# Altium PCB SY_HR08_MCU_PCB_V1.1.PcbDoc (part 3 of 3)
Units mm, origin at the board's own origin, x right, y up, seen from the top; angles counter-clockwise.
Board outline 140 x 80 mm, 2 copper layers (Top Layer, Bottom Layer); 373 components, 215 nets, 1143 pads, 670 vias.
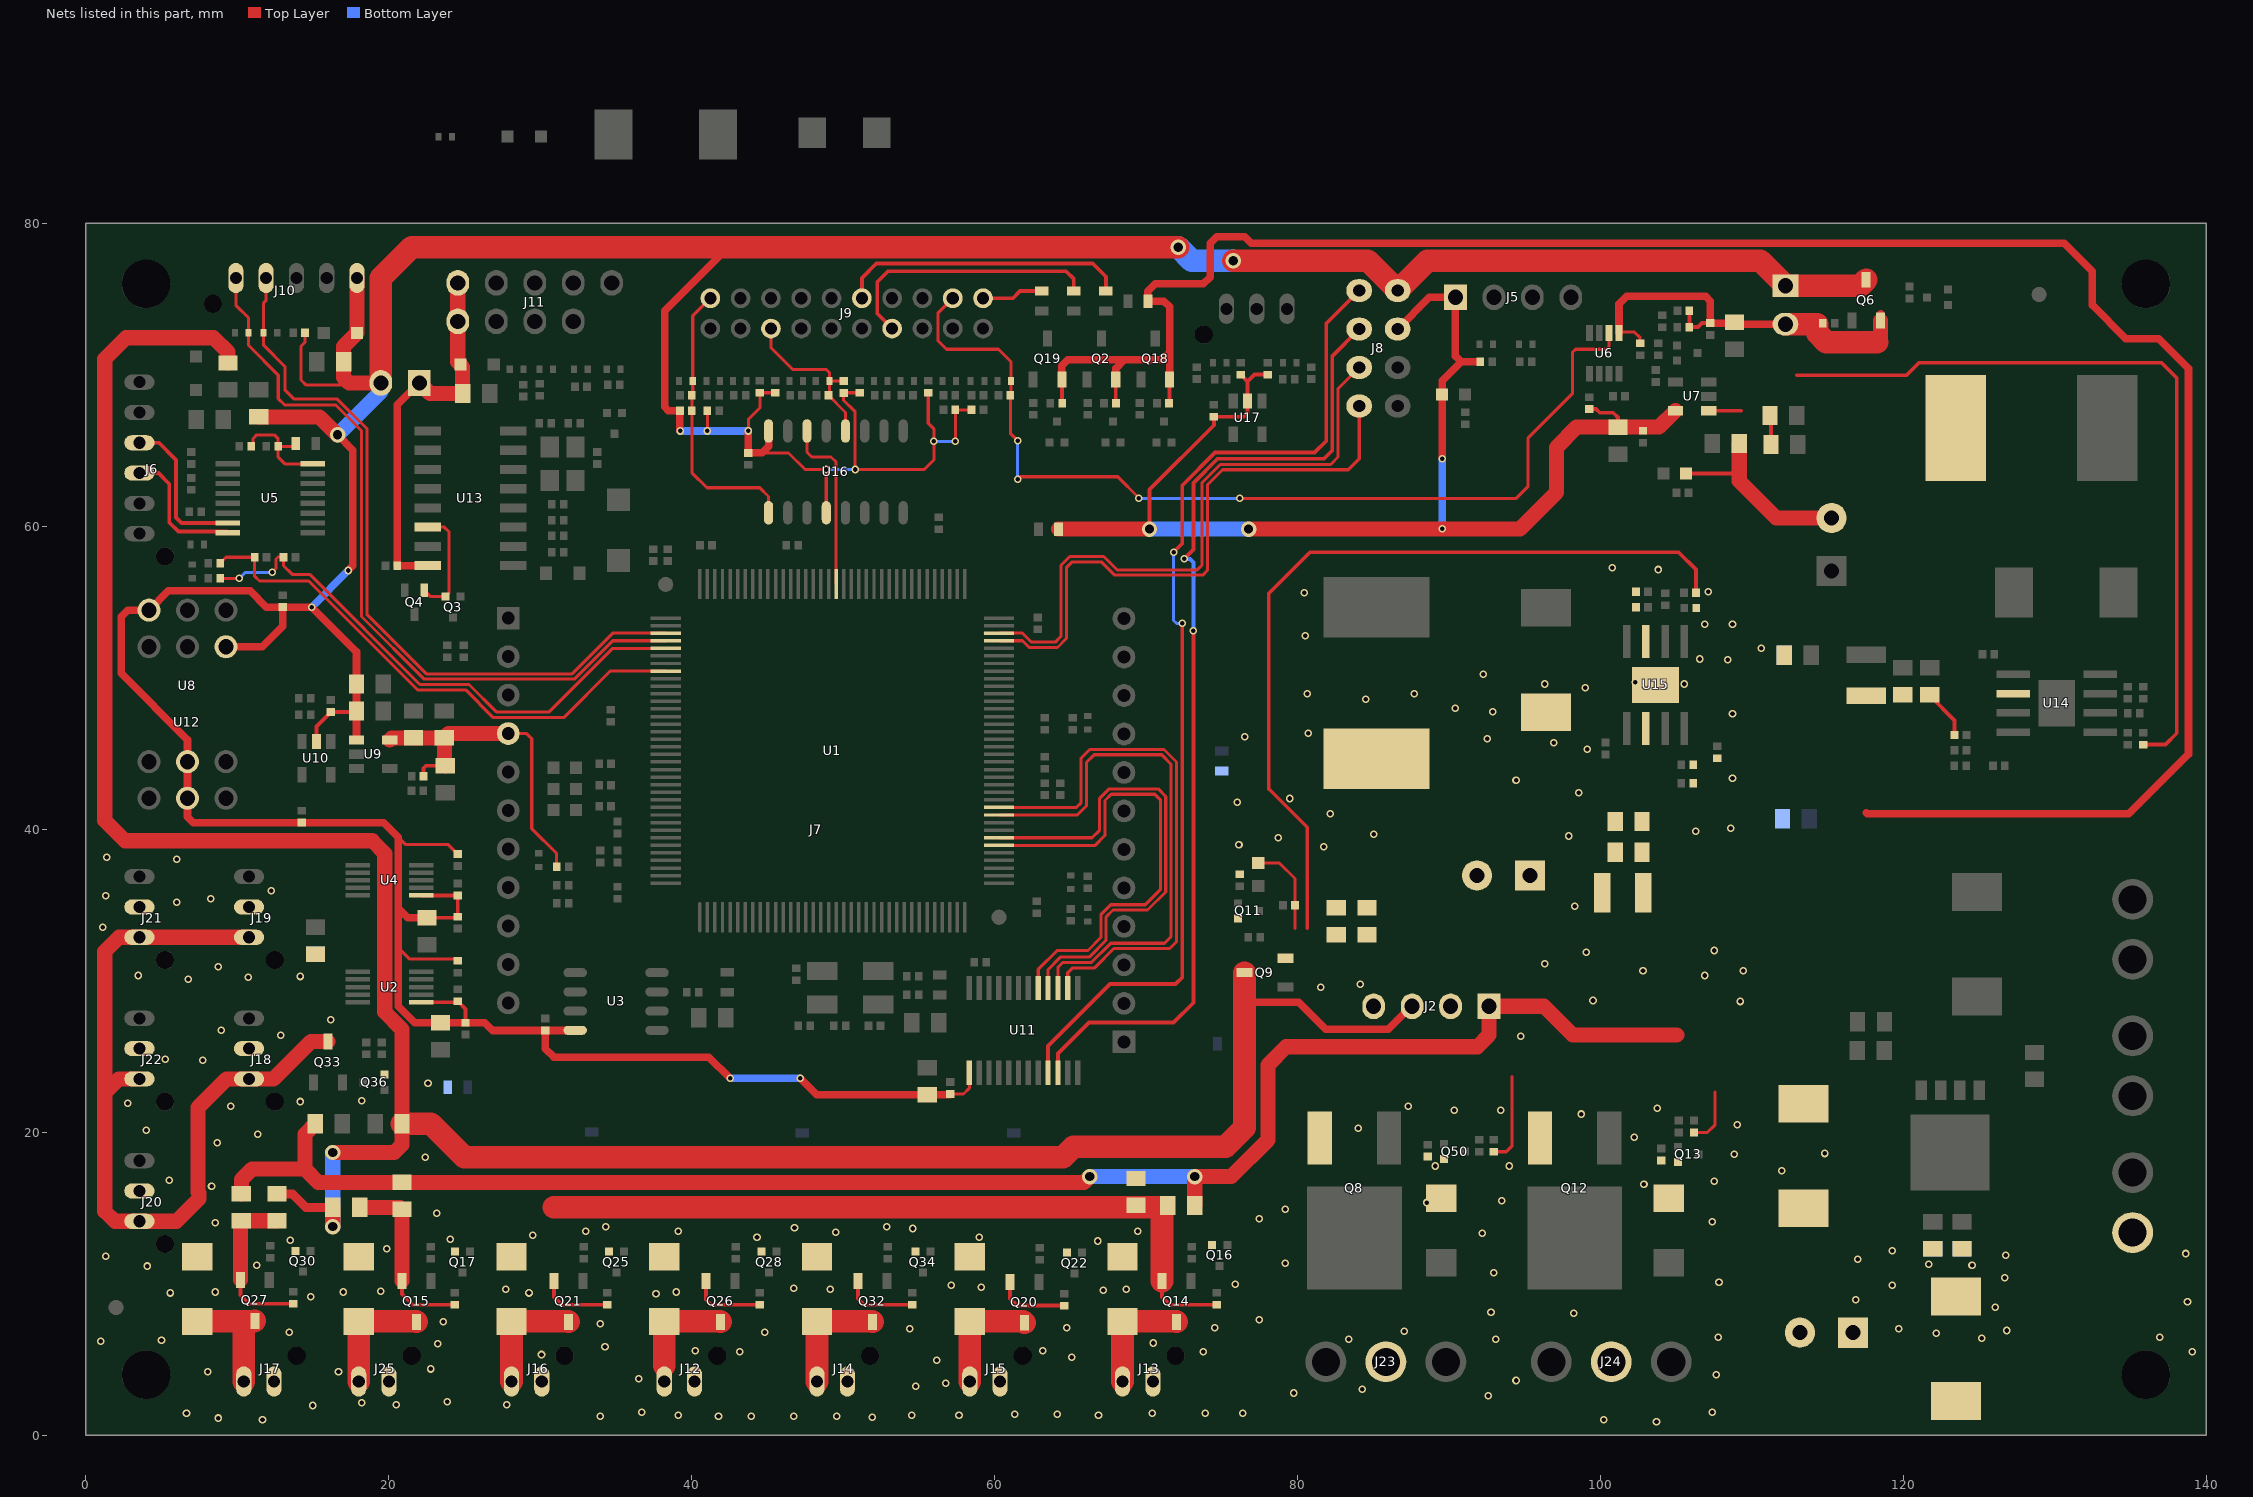
[diagram p3: the nets of this part, all layers, seen from the top]

## Via types
v1: diameter 0.5, hole 0.3, Top Layer to Bottom Layer, tented both sides, 661 vias
v2: diameter 1.016, hole 0.61, Top Layer to Bottom Layer, tented both sides, 9 vias

## Nets (pads, with @x,y where several pads share a name; then routed paths per layer and width w, separated by ;. In a path a pad name is that pad's centre, name@x,y a point inside that pad or via, vN(x,y) a via of type N, cw(c..) or ccw(c..) an arc to the next point about the centre after c; other vN are vias at no path point) (continued)
PB_GS: U1.90 U16.14 | length 11.6
  Top Layer w0.203: U16.14@47.625,66.296 47.625,64.897 47.942,64.579 49.212,64.579 49.546,64.246 U1.90@49.546,56.197
PGND: C1.2 C71.1 C72.2 C73.1 C74.1 C75.1 C76.1 C77.1 C78.1 C79.1 C80.2 C82.2 D3.1 D23.2 D25.2 D26.2 D27.2 D28.2 D29.2 D30.2 D31.2 D32.2 D33.2 J2.2 J2.4 J12.2 J13.2 J14.2 J15.2 J16.2 J17.2 J18.2 J19.2 J20.2 J21.2 J22.2 J23.2 J24.2 J25.2 Q11.2 Q13.2 Q16.2 Q17.2 Q22.2 Q25.2 Q28.2 Q30.2 Q34.2 Q36.2 Q50.2 R3.2 R4.2 R5.2 R6.2 R28.1 R79.1 R83.1 R84.1 R86.1 R89.1 R90.1 R91.1 R92.1 R107.1 R136.1 R137.1 R138.1 R139.1 R140.1 U15.7 U15.9
  other v1: 103.695,0.889 11.684,1.016 100.203,1.016 8.763,1.143 51.943,1.206 33.972,1.27 41.783,1.27 43.942,1.27 46.736,1.27 49.593,1.27 39.116,1.333 54.546,1.333 57.658,1.333 66.865,1.333 61.341,1.397 64.135,1.397 6.667,1.46 70.421,1.46 73.914,1.46 76.391,1.46 36.703,1.524 107.379,1.524 14.986,1.968 20.511,2.032 27.813,2.032 18.224,2.159 23.876,2.222 92.583,2.603 79.756,2.794 84.264,3.048 54.8,3.238 56.769,3.429 94.424,3.619 36.512,3.746 107.632,4 8.064,4.191 16.7,4.191 22.796,4.381 100.647,4.381 56.197,4.953 65.087,5.143 86.487,5.271 30.099,5.334 43.18,5.524 73.787,5.524 139.065,5.524 40.259,5.588 63.182,5.588 34.29,5.842 23.241,6.032 70.485,6.096 1.016,6.223 5.016,6.286 83.376,6.35 93.091,6.35 125.158,6.413 107.759,6.477 136.906,6.477 122.174,6.731 13.462,6.794 44.831,6.794 87.058,6.858 126.809,6.921 54.419,7.048 119.697,7.048 64.77,7.112 74.549,7.112 33.972,7.366 23.622,7.493 77.47,7.62 98.234,8.064 92.773,8.128 126.047,8.445 138.748,8.826 116.84,8.954 14.859,9.144 37.655,9.335 5.588,9.398 29.273,9.398 8.572,9.461 17.018,9.461 38.989,9.461 19.494,9.525 67.183,9.588 27.749,9.652 49.149,9.652 68.707,9.652 46.736,9.716 59.118,9.779 57.15,9.906 119.253,9.906 75.882,9.97 107.823,10.096 126.682,10.414 92.964,10.731 4.064,11.176 11.303,11.239 124.523,11.239 121.666,11.303 79.184,11.367 116.967,11.62 1.333,11.811 126.746,11.874 138.62,12.002 119.253,12.192 19.875,12.319 66.802,12.827 13.525,12.89 24.066,12.954 44.323,13.081 58.991,13.081 29.527,13.208 92.202,13.335 49.53,13.399 33.02,13.462 39.116,13.462 69.469,13.462 54.61,13.652 46.799,13.716 34.353,13.779 52.895,13.779 8.572,14.034 107.379,14.097 77.47,14.287 23.177,14.668 79.184,14.922 88.519,15.367 93.472,15.494 8.319,16.447 102.87,16.573 107.505,16.764 5.524,16.828 111.95,17.462 89.09,17.78 93.98,17.78 22.415,18.351 108.839,18.542 114.808,18.605 8.7,19.304 102.235,19.685 11.367,19.875 4,20.13 84.01,20.256 109.029,20.511 98.742,21.209 90.361,21.463 93.408,21.463 103.759,21.59 9.588,21.717 87.312,21.717 2.794,21.907 14.16,22.034 18.224,22.098 22.606,23.241 7.747,24.765 5.271,24.828 94.742,26.352 12.89,26.416 8.954,26.733 16.192,27.432 109.22,28.639 99.504,28.702 81.534,29.591 84.138,29.781 6.794,30.099 10.731,30.226 14.16,30.29 3.492,30.353 106.87,30.353 102.806,30.67 109.41,30.67 8.763,30.924 96.329,31.115 99.06,31.877 107.505,32.004 1.143,33.528 98.298,34.925 6.032,35.179 8.255,35.433 1.333,35.623 12.255,35.941 6.032,38.036 1.397,38.163 81.724,38.862 76.136,38.989 78.74,39.433 97.917,39.56 85.026,39.688 106.299,39.878 108.585,40.069 82.169,41.021 76.01,41.783 79.502,42.037 98.552,42.418 94.424,43.243 108.712,43.37 99.123,45.276 96.901,45.72 92.519,45.974 76.517,46.101 80.709,46.355 108.712,47.625 92.9,47.752 90.424,48.006 84.519,48.578 80.645,48.959 87.694,48.959 98.996,49.34 96.329,49.593 105.537,49.593 102.298,49.721 92.266,50.228 108.394,51.181 106.553,51.244 110.617,51.943 80.518,52.768 106.87,53.53 108.712,53.53 80.454,55.626 107.124,55.689 103.822,57.15 100.774,57.277
PRINT: C41.2 D38.1 J9.3 R112.1 U16.12 | length 11.1
  Top Layer w0.203: J9.3@45.245,73.057 45.245,71.786 46.672,70.358 48.895,70.358 49.101,70.152 D38.1@49.101,69.596 ; R112.1@50.038,69.596 D38.1@49.101,69.596 ; U16.12@50.165,66.296 50.165,67.517 C41.2@49.039,68.644 49.101,68.706 D38.1@49.101,69.596
PWM_MCU1: U1.42 U11.17 | length 31.8
  Top Layer w0.203: U1.42@60.296,38.948 66.642,38.948 67.299,39.605 67.299,41.908 67.71,42.319 70.584,42.319 70.949,41.954 70.949,36.016 69.958,35.024 67.672,35.024 67.02,34.373 67.02,32.857 66.167,32.004 64.135,32.004 62.887,30.756 U11.17@62.887,29.533
PWM_MCU2: U1.43 U11.16 | length 32.1
  Top Layer w0.203: U1.43@60.296,39.448 66.435,39.448 66.937,39.949 66.937,42.045 67.564,42.672 70.802,42.672 71.303,42.172 71.303,35.87 70.104,34.671 67.818,34.671 67.373,34.227 67.373,32.694 66.247,31.567 64.35,31.567 63.537,30.754 U11.16@63.537,29.533
PWM_MCU3: U1.46 U11.15 | length 36
  Top Layer w0.203: U1.46@60.296,40.948 65.468,40.948 66.076,41.555 66.076,44.422 66.576,44.922 71.037,44.922 71.656,44.304 71.656,32.921 71.219,32.484 67.663,32.484 66.393,31.214 64.497,31.214 64.187,30.905 U11.15@64.187,29.533
PWM_MCU4: U1.47 U11.14 | length 36.3
  Top Layer w0.203: U1.47@60.296,41.448 65.405,41.448 65.722,41.765 65.722,44.704 66.294,45.276 71.183,45.276 72.009,44.45 72.009,32.575 71.564,32.131 67.882,32.131 66.611,30.861 65.155,30.861 64.837,30.543 U11.14@64.837,29.533
PWM_REV1: J8.3 U11.10 | length 65.4
  Top Layer w0.254: U11.10@64.187,23.934 64.187,25.198 66.23,27.241 71.819,27.241 73.129,28.552 v1(73.129,53.109) ; v1(72.517,57.848) 73.129,58.461 73.129,62.865 74.73,64.466 81.738,64.466 82.298,65.026 82.298,71.249 J8.3@84.074,73.025
  Bottom Layer w0.254: v1(72.517,57.848) 72.898,57.848 73.129,57.617 v1(73.129,53.109)
PWM_REV2: J8.1 U11.9 | length 67.2
  Top Layer w0.254: U11.9@63.537,23.934 63.537,25.691 67.627,29.781 71.945,29.781 72.39,30.226 v1(72.39,53.594) ; v1(71.819,58.293) 72.39,58.864 72.39,62.697 74.563,64.87 81.126,64.87 81.894,65.638 81.894,73.385 J8.1@84.074,75.565
  Bottom Layer w0.203: v1(71.819,58.293) 71.819,53.785 72.009,53.594 v1(72.39,53.594)
PWR_VALVE1: D28.1 J13.1 Q14.3 | length 7.6
  Top Layer w1.5: J13.1@68.453,3.556 68.453,7.46 68.422,7.491 D28.1@68.453,7.522 71.98,7.522 Q14.3@72.009,7.493
PWR_VALVE2: D27.1 J15.1 Q20.3 | length 7.6
  Top Layer w1.5: J15.1@58.369,3.556 D27.1@58.369,7.522 61.884,7.522 Q20.3@61.976,7.429
PWR_VALVE3: D26.1 J12.1 Q26.3 | length 6.6
  Top Layer w1.5: 38.202,4.597 D26.1@38.202,7.522 41.881,7.522 Q26.3@41.91,7.493
PWR_VALVE4: D25.1 J14.1 Q32.3 | length 7.6
  Top Layer w1.5: J14.1@48.285,3.556 D25.1@48.285,7.522 51.914,7.522 Q32.3@51.943,7.493
PWR_VALVE5: D29.1 J16.1 Q21.3 | length 7.7
  Top Layer w1.5: J16.1@28.118,3.556 D29.1@28.118,7.522 31.848,7.522 Q21.3@31.877,7.493
PWR_VALVE6: J18.3 J19.3 J20.3 J21.3 J22.3 Q33.3 | length 53.3
  Top Layer w1: J22.3@3.556,23.527 2.191,23.527 1.27,22.606 ; J19.3@10.795,32.877 J21.3@3.556,32.877 2.206,32.877 1.27,31.941 1.27,22.606 ; Q33.3@16.002,25.988 14.875,25.988 12.414,23.527 J18.3@10.795,23.527 9.303,23.527 7.418,21.642 7.418,16.074 7.493,15.999 7.493,15.621 6.001,14.129 J20.3@3.556,14.129 1.937,14.129 1.27,14.795 1.27,22.606
PWR_VALVE_REV1: D30.1 J25.1 Q15.3 | length 7.8
  Top Layer w1.5: J25.1@18.034,3.556 D30.1@18.034,7.522 21.815,7.522 Q15.3@21.844,7.493
PWR_VALVE_REV2: D31.1 J17.1 Q27.3 | length 7.8
  Top Layer w1.5: D31.1@7.366,7.522 10.446,7.522 ; J17.1@10.446,3.556 10.446,7.522 ; Q27.3@11.176,7.556 11.141,7.522 10.446,7.522
PWRKEY+: C53.2 D46.1 J9.12 U6.2 | length 64.8
  Top Layer w0.203: J9.12@57.244,75.057 56.261,74.074 56.261,72.263 56.832,71.691 60.261,71.691 61.092,70.861 D46.1@61.092,69.596 61.092,68.687 C53.2@61.049,68.644 61.049,66.141 v1(61.531,65.659) ; v1(61.531,63.119) 61.686,63.274 68.135,63.274 69.532,61.877 v1(69.532,61.849) ; v1(76.2,61.849) 94.433,61.849 95.207,62.623 95.207,65.813 98.144,68.75 98.144,71.474 98.361,71.691 100.393,71.691 100.569,71.867 U6.2@100.569,72.771
  Bottom Layer w0.203: v1(61.531,63.119) v1(61.531,65.659) ; v1(69.532,61.849) v1(76.2,61.849)
PWRLED+: J9.11 R52.2 | length 4.1
  Top Layer w0.254: J9.11@59.244,75.057 61.214,75.057 61.684,75.527 R52.2@63.119,75.527
RCD: J9.15 R51.2 | length 19.1
  Top Layer w0.254: J9.15@51.244,75.057 51.244,76.391 52.197,77.343 66.484,77.343 67.352,76.475 R51.2@67.352,75.527
RS232_RX: J6.4 U5.8 | length 9
  Top Layer w0.254: J6.4@3.556,63.516 4.81,63.516 5.524,62.801 5.524,60.261 6.137,59.649 9.317,59.649 U5.8@9.392,59.574
RS232_TX: J6.3 U5.7 | length 10.3
  Top Layer w0.254: J6.3@3.556,65.516 4.842,65.516 5.969,64.389 5.969,60.579 6.324,60.224 U5.7@9.392,60.224
RTS: Q3.2 Q4.1 U13.14 | length 7.5
  Top Layer w0.203: Q4.1@22.367,55.791 22.795,55.364 Q3.2@23.757,55.364 ; U13.14@22.575,59.944 23.685,59.944 24.003,59.627 24.003,55.626 Q3.2@23.749,55.372
SLIENCE: C40.2 D37.1 J9.20 R110.1 U16.1 | length 18.8
  Top Layer w0.203: J9.20@41.245,75.057 40.081,73.894 D37.1@40.081,69.596 40.081,68.7 C40.2@40.025,68.644 R110.1@40.025,67.627 40.025,63.543 41.021,62.547 44.514,62.547 45.085,61.976 U16.1@45.085,60.896
UART4_RX: D35.1 J10.5 U1.112 | length 50.6
  Top Layer w0.203: J10.5@9.922,76.391 9.922,74.597 10.753,73.766 D35.1@10.753,72.771 10.753,71.945 12.721,69.977 12.721,68.432 13.144,68.008 16.519,68.008 18.217,66.31 18.217,54.046 22.352,49.911 32.267,49.911 34.803,52.448 U1.112@38.296,52.448
UART4_TX: D36.1 J10.4 U1.111 | length 49.2
  Top Layer w0.203: J10.4@11.922,76.391 11.922,74.914 11.758,74.75 D36.1@11.758,72.771 11.758,71.945 13.155,70.549 13.155,69.014 13.769,68.4 16.627,68.4 18.57,66.457 18.57,54.193 22.498,50.264 32.12,50.264 34.804,52.948 U1.111@38.296,52.948
USART2_RX: J8.5 U1.70 | length 41.8
  Top Layer w0.15: U1.70@59.363,52.948 U1.70@60.296,52.948
  Top Layer w0.203: U1.70@60.296,52.948 61.852,52.948 62.44,52.36 64.008,52.36 64.389,52.741 64.389,57.423 64.977,58.011 67.202,58.011 68.083,57.13 73.386,57.13 73.692,57.436 73.692,62.23 73.7,62.238 73.7,62.879 74.908,64.087 82.185,64.087 82.677,64.579 82.677,69.088 J8.5@84.074,70.485
USART2_TX: J8.7 U1.69 | length 39.4
  Top Layer w0.203: U1.69@60.296,52.448 61.852,52.448 62.293,52.006 64.154,52.006 64.742,52.594 64.742,57.277 65.123,57.658 67.056,57.658 67.937,56.777 73.748,56.777 74.053,57.081 74.053,62.732 75.055,63.734 83.356,63.734 84.074,64.453 J8.7@84.074,67.945
USART3_RX: R20.2 R23.2 U1.113 | length 36.7
  Top Layer w0.15: R23.2@13.068,57.96 R23.2@13.068,57.975
  Top Layer w0.203: R20.2@8.89,56.563 v1(10.145,56.563) ; v1(12.319,56.959) 12.573,57.213 12.573,57.848 12.7,57.975 R23.2@13.068,57.975 ; R23.2@13.068,57.96 13.068,57.404 13.64,56.832 14.795,56.832 22.07,49.558 25.309,49.558 27.114,47.752 30.607,47.752 34.803,51.948 U1.113@38.296,51.948
  Bottom Layer w0.203: v1(10.145,56.563) 10.541,56.959 v1(12.319,56.959)
USART3_TX: R21.2 R22.2 U1.116 | length 36
  Top Layer w0.203: R21.2@8.89,57.579 9.271,57.96 R22.2@11.163,57.96 11.163,56.706 11.481,56.388 14.732,56.388 21.915,49.205 25.09,49.205 26.924,47.371 31.559,47.371 34.636,50.448 U1.116@38.296,50.448
VBUS: C55.1 C59.2 D18.1 J11.1 J11.2 JP1.1 U13.16 | length 25.2
  Top Layer w0.5: JP1.1@22.034,69.469 20.587,68.021 C55.1@20.587,57.404 U13.16@22.575,57.404
  Top Layer w1: JP1.1@22.034,69.469 22.733,68.77 C59.2@24.892,68.77 24.892,70.528 D18.1@24.744,70.675 24.575,70.845 J11.1@24.575,73.533 J11.2@24.575,76.073
VCC_3V3: C36.2 C37.2 C91.1 D50.2 J5.1 J8.4 R14.2 R24.2 R29.1 R80.1 R82.1 U7.5 U17.2 | length 86.1
  Top Layer w0.254: v2(70.231,59.817) 70.231,62.42 74.486,66.675 C91.1@74.486,67.234 76.441,67.234 76.708,67.501 U17.2@76.708,68.283 76.708,69.57 ; R80.1@76.263,70.015 76.708,69.57 ; R82.1@78.041,70.015 77.153,70.015 76.708,69.57 ; R24.2@99.269,67.742 99.708,67.742 99.949,67.501 100.838,67.501 101.155,67.183 C36.2@101.155,66.548
  Top Layer w0.5: J8.4@86.614,73.025 88.709,75.12 J5.1@90.424,75.12 90.424,71.247 90.805,70.866 ; v1(89.547,64.464) D50.2@89.547,68.707 89.547,69.608 90.805,70.866 ; R14.2@92.062,70.866 90.805,70.866
  Top Layer w1: R29.1@64.224,59.817 v2(70.231,59.817) ; v2(76.772,59.817) 94.678,59.817 97.091,62.23 97.091,65.215 98.425,66.548 C36.2@101.155,66.548 103.863,66.548 U7.5@104.945,67.63
  Bottom Layer w0.5: v1(89.547,59.829) v1(89.547,64.464)
  Bottom Layer w1: v2(70.231,59.817) v2(76.772,59.817)
VCC_3V3_DEVICE: C25.1 C27.1 R135.2 U5.16 | length 7.3
  Top Layer w0.203: C27.1@11.062,65.278 11.062,65.799 11.303,66.04 12.454,66.04 12.713,65.781 C25.1@12.713,65.278 ; R135.2@13.881,65.468 13.691,65.278 C25.1@12.713,65.278 ; U5.16@14.992,64.124 13.156,64.124 12.713,64.567 C25.1@12.713,65.278
VCC_5V: C30.1 C32.2 C34.2 C61.1 C62.2 C63.2 D22.2 JP2.2 L1.2 Q6.2 R34.2 R35.2 R66.2 R70.2 R131.2 U6.1 U7.1 | length 97.3
  Top Layer w0.203: U6.1@101.219,72.771 101.282,72.834 102.235,72.834 102.616,72.453 R131.2@102.616,72.085
  Top Layer w0.254: D22.2@105.652,63.5 108.648,63.5 109.156,64.008 ; R35.2@105.867,74.231 105.867,73.165 R34.2@105.855,73.152 106.426,73.152 106.693,73.419 C30.1@107.251,73.419 ; U7.1@107.145,67.63 109.281,67.63 ; C62.2@111.252,65.405 C63.2@111.252,67.246 ; 112.966,69.977 120.206,69.977 121.031,70.802 137.033,70.802 138.034,69.801 138.034,46.34 137.287,45.593 R66.2@135.826,45.593
  Top Layer w0.5: U6.1@101.219,72.771 101.219,74.676 101.727,75.184 106.934,75.184 107.251,74.867 C30.1@107.251,73.419 108.763,73.419 108.826,73.482 C32.2@108.839,73.469 108.966,73.343 JP2.2@112.204,73.343 ; Q6.2@118.489,73.58 Q6.2@118.489,74.039
  Top Layer w1: C34.2@109.156,65.468 109.156,64.008 109.156,62.992 111.598,60.551 C61.1@115.252,60.551 ; 118.256,72.155 118.489,72.388 Q6.2@118.489,73.58
  Top Layer w1.5: JP2.2@112.204,73.343 114.302,73.343 114.302,72.754 114.901,72.155 118.256,72.155
VCC_5V_DEVICE: C20.1 C21.2 C22.2 C23.1 C24.2 C35.2 C38.2 C50.2 C51.1 C81.1 C84.1 C87.2 C88.2 C89.1 D34.1 J8.2 J10.1 JP1.2 JP2.1 Q6.3 R18.2 R30.2 R31.2 R32.2 R33.2 R55.2 R110.2 R112.2 R115.2 R116.2 R119.2 R122.2 R127.2 R128.2 R129.2 U2.1 U3.8 U4.1 U8.2 U8.4 U9.1 U10.2 U11.1 U12.2 U12.4 U16.4 U16.16 | length 345.6
  Top Layer w0.203: R55.2@14.491,72.771 14.491,72.149 14.224,71.882 14.224,69.659 14.541,69.342 17.272,69.342 17.399,69.469 ; 20.648,32.194 21.41,31.432 24.46,31.432 R31.2@24.575,31.318 ; 20.648,39.486 21.145,38.989 23.952,38.989 R33.2@24.575,38.367 ; C21.2@22.538,34.163 24.498,34.163 C23.1@24.575,34.239 ; v1(41.048,66.296) R115.2@41.048,67.627 ; v1(43.749,66.296) 43.749,67.054 44.514,67.818 R127.2@44.514,68.821 R119.2@45.529,68.821 ; 44.653,64.846 46.406,64.846 47.498,63.754 v1(48.895,63.754) U16.4@48.895,60.896 ; R129.2@51.117,68.821 50.051,68.821 R112.2@50.038,68.808 50.038,68.326 50.8,67.564 v1(50.8,63.754) 55.372,63.754 55.994,64.376 v1(55.994,65.608) 55.994,66.434 55.626,66.802 R116.2@55.626,68.821 ; C50.2@57.087,22.537 57.957,22.537 58.338,22.918 U11.1@58.338,23.934 ; v1(57.417,65.608) R128.2@57.417,67.691 R122.2@58.483,67.691
  Top Layer w0.254: U10.2@15.24,45.804 15.24,46.797 C87.2@16.192,47.75 17.821,47.75 C38.2@17.886,47.816 ; U2.1@22.166,28.591 24.511,28.591 R30.2@24.575,28.654 25.082,28.146 C20.1@25.082,27.241 ; U4.1@22.166,35.639 R32.2@24.575,35.639 C23.1@24.575,34.239
  Top Layer w0.5: U12.4@9.271,52.054 11.668,52.054 13.018,53.404 C81.1@13.018,54.673 ; v2(16.637,66.04) 17.653,65.024 17.653,57.404 v1(17.335,57.087) ; U9.1@17.886,45.908 C38.2@17.886,47.816 C35.2@17.886,49.593 17.886,51.71 v1(14.922,54.673) C81.1@13.018,54.673 ; C21.2@22.538,34.163 21.283,34.163 20.648,34.798 ; U3.8@32.322,26.733 32.309,26.721 C22.2@30.353,26.721 ; v1(39.245,66.296) 39.238,66.304 R110.2@39.238,67.627 38.481,67.627 38.227,67.882 38.227,74.231 42.418,78.422 ; v1(42.545,23.558) 41.148,24.956 30.924,24.956 30.353,25.527 C22.2@30.353,26.721 ; v1(43.749,66.296) C88.2@43.749,64.846 44.653,64.846 45.085,65.278 U16.16@45.085,66.296 ; v1(47.18,23.558) 48.26,22.479 C51.1@55.562,22.479 57.029,22.479 C50.2@57.087,22.537 ; C81.1@13.018,54.673 11.938,54.673 10.858,55.753 5.477,55.753 U8.4@4.191,54.467 2.778,54.467 2.349,54.038 2.349,50.292 6.731,45.91 U8.2@6.731,44.466 U12.2@6.731,42.053 6.731,40.831 7.112,40.45 C89.1@14.287,40.45 19.685,40.45 20.648,39.486 20.648,34.798 ; 20.648,34.798 20.648,32.194 20.648,28.313 21.72,27.241 C24.2@23.431,27.241 C20.1@25.082,27.241 26.352,27.241 26.873,26.721 C22.2@30.353,26.721
  Top Layer w1: R18.2@11.43,67.226 15.451,67.226 v2(16.637,66.04) ; J10.1@17.922,76.391 D34.1@17.922,72.771 17.033,71.882 C84.1@17.033,70.866 17.033,69.835 17.399,69.469 JP1.2@19.494,69.469
  Top Layer w1.5: JP1.2@19.494,69.469 19.494,76.391 21.526,78.422 42.418,78.422 v2(72.136,78.422) ; v2(75.755,77.534) 84.645,77.534 J8.2@86.614,75.565 88.582,77.534 110.553,77.534 JP2.1@112.204,75.882 117.141,75.882 Q6.3@117.538,76.28
  Bottom Layer w0.203: v1(48.895,63.754) v1(50.8,63.754) ; v1(55.994,65.608) v1(57.417,65.608)
  Bottom Layer w0.5: v1(14.922,54.673) v1(17.335,57.087) ; v1(39.245,66.296) v1(41.048,66.296) v1(43.749,66.296) ; v1@42.672,23.558 v1(47.18,23.558)
  Bottom Layer w1: v2(16.637,66.04) 19.494,68.897 JP1.2@19.494,69.469
  Bottom Layer w1.5: v2(72.136,78.422) 73.025,77.534 v2(75.755,77.534)
VCC_12V: C71.2 C72.1 C73.2 D24.2 L2.2 Q9.2 R76.2 R81.2 | length 60.6
  Top Layer w0.203: D24.2@77.406,37.771 78.815,37.771 79.832,36.754 R81.2@79.832,34.989 79.832,33.452 ; 78.105,42.672 80.645,40.132 80.645,33.465
  Top Layer w0.254: 78.105,42.672 78.105,55.562 80.835,58.293 105.156,58.293 106.299,57.15 R76.2@106.299,55.626
VCC_12V_DEVICE: J2.3 Q9.3 R19.2 R49.1 R67.1 R121.1 R124.1 | length 174.4
  Top Layer w0.5: 76.501,28.575 80.073,28.575 81.852,26.797 85.979,26.797 87.503,28.321 J2.3@87.566,28.321
  Top Layer w0.6: R124.1@12.639,15.938 13.652,15.938 14.541,15.05 R121.1@16.319,15.05
  Top Layer w1: R19.2@9.398,70.782 9.398,71.501 8.445,72.453 2.667,72.453 1.27,71.056 1.27,40.576 2.603,39.243 18.923,39.243 19.748,38.417 19.748,27.94 20.892,26.797 R67.1@20.892,20.574 20.892,19.177 20.383,18.669 v2(16.319,18.669) ; v2(16.319,13.779) R121.1@16.319,15.05
  Top Layer w1.5: R67.1@20.892,20.574 22.796,20.574 25.019,18.351 64.516,18.351 65.215,19.05 75.248,19.05 76.501,20.304 76.501,28.575 Q9.3@76.501,30.543
  Bottom Layer w1: v2(16.319,13.779) v2(16.319,18.669)
VCC_24V: C64.2 C66.2 C67.2 C74.2 C76.2 C77.2 D2.1 J2.1 Q2.2 Q8.2 Q12.2 Q18.2 Q19.2 R15.2 R37.1 R45.2 R53.2 R54.1 R69.2 R94.2 R96.2 R99.2 R117.1 R123.1 U14.2 U15.2 | length 270.7
  Top Layer w0.203: R45.2@92.964,18.72 93.777,18.72 94.17,19.113 94.17,23.685 ; R15.2@106.172,19.99 107.048,19.99 107.569,20.511 107.569,22.669
  Top Layer w0.254: Q19.2@64.45,69.707 64.45,68.151 R99.2@64.465,68.135 ; Q2.2@68.006,69.707 68.006,68.151 R94.2@68.021,68.135 ; R96.2@71.514,68.135 71.562,68.184 Q18.2@71.562,69.707 ; C67.2@121.73,48.895 121.73,48.831 123.368,47.193 R69.2@123.368,46.228
  Top Layer w0.5: Q19.2@64.45,69.707 64.45,70.612 64.831,70.993 68.58,70.993 ; Q2.2@68.006,69.707 68.006,70.419 68.58,70.993 ; Q18.2@71.562,69.707 71.564,69.709 71.564,71.501 ; 117.538,41.084 117.602,41.021 134.874,41.021 138.811,44.958 138.811,70.421 136.843,72.39 134.683,72.39 132.461,74.612 132.461,76.835 130.613,78.683 76.955,78.683 76.517,79.121 74.676,79.121 74.231,78.676 74.231,76.454 73.787,76.01 70.612,76.01 70.129,75.527 R53.2@70.129,74.867 71.183,74.867 71.564,74.486 71.564,71.501 ; 68.58,70.993 71.056,70.993 71.564,71.501
  Top Layer w1: R123.1@10.287,15.938 10.287,16.891 10.986,17.59 14.478,17.59 ; R54.1@15.176,20.574 14.478,19.875 14.478,17.59 ; v2(66.294,17.081) 65.913,16.7 R117.1@20.894,16.7 15.367,16.7 14.478,17.59 ; R37.1@73.215,15.176 v2(73.215,17.081) 75.629,17.081 78.041,19.494 78.041,24.447 79.248,25.654 91.885,25.654 92.647,26.416 J2.1@92.647,28.321 96.266,28.321 98.171,26.416 105.029,26.416
  Bottom Layer w1: v2(66.294,17.081) v2(73.215,17.081)
VCC_24V_IN: C1.1 D2.2 D3.2 J4.1
VCC_NBIOT: C39.1 C54.2 C85.2 J7.16 R40.1 R43.2 U9.5 | length 22.7
  Top Layer w0.203: J7.16@27.905,46.32 29.118,46.32 29.456,45.982 29.456,40.049 31.102,38.403 R40.1@31.102,37.529
  Top Layer w0.254: R43.2@22.314,43.497 22.314,44.031 22.479,44.196 C54.2@23.749,44.196
  Top Layer w1: U9.5@20.087,45.908 20.216,46.038 C85.2@21.653,46.038 C39.1@23.685,46.038 ; C54.2@23.749,44.196 23.685,44.259 C39.1@23.685,46.038 ; J7.16@27.905,46.32 23.968,46.32 C39.1@23.685,46.038
VCC_ULN1: Q15.2 R95.2 R117.2 R121.2 | length 12.2
  Top Layer w0.254: Q15.2@20.894,10.193 20.894,9.332 21.603,8.623 R95.2@24.384,8.623
  Top Layer w1: R121.2@18.098,15.05 20.767,15.05 R117.2@20.894,14.922 Q15.2@20.894,10.193
VCC_ULN2: Q27.2 R111.2 R123.2 R124.2 | length 11
  Top Layer w0.254: Q27.2@10.226,10.256 10.226,9.269 10.808,8.687 R111.2@13.716,8.687
  Top Layer w1: Q27.2@10.226,10.256 10.226,14.099 R123.2@10.287,14.16 R124.2@12.639,14.16
VCC_VALVE: Q14.2 Q20.2 Q21.2 Q26.2 Q32.2 R37.2 R49.2 R93.2 R101.2 R103.2 R109.2 R118.2 | length 69.3
  Top Layer w0.254: Q21.2@30.927,10.193 30.927,9.142 31.445,8.623 R103.2@34.442,8.623 ; Q26.2@40.96,10.193 40.96,8.951 41.288,8.623 R109.2@44.501,8.623 ; Q32.2@50.993,10.193 50.993,9.015 51.384,8.623 R118.2@54.559,8.623 ; Q20.2@61.026,10.129 61.026,9.015 61.481,8.56 R101.2@64.618,8.56 ; Q14.2@71.059,10.193 71.059,9.142 71.577,8.623 R93.2@74.676,8.623
  Top Layer w1.5: 30.927,15.052 64.289,15.052 64.294,15.057 70.991,15.057 71.059,14.988 Q14.2@71.059,10.193
YLD: J9.7 R50.2 | length 17.8
  Top Layer w0.254: J9.7@53.244,73.057 52.261,74.041 52.261,76.136 52.959,76.835 64.728,76.835 65.236,76.327 R50.2@65.236,75.527
pads on no net: Designator41.1 Designator41.2 Designator42.1 Designator42.2 Designator43.1 Designator43.2 Designator44.1 Designator44.2 F1.1 F2.1 F3.1 F4.1 J6.7 J7.1 J7.2 J7.3 J7.4 J7.5 J7.8 J7.10 J7.13 J7.14 J7.15 J7.17 J7.18 J7.20 J7.21 J7.22 J7.23 J9.8 J9.9 J10.6 J12.3 J13.3 J14.3 J15.3 J16.3 J17.3 J18.4 J19.4 J20.4 J21.4 J22.4 J25.3 J26.4 U1.0 U1.5 U1.15 U1.18 U1.19 U1.20 U1.21 U1.22 U1.27 U1.28 U1.29 U1.49 U1.50 U1.53 U1.54 U1.56 U1.57 U1.58 U1.59 U1.60 U1.68 U1.76 U1.77 U1.78 U1.79 U1.80 U1.81 U1.82 U1.85 U1.86 U1.91 U1.92 U1.93 U1.96 U1.97 U1.98 U1.99 U1.106 U1.114 U1.115 U1.119 U1.122 U1.123 U1.125 U1.127 U1.129 U1.132 U1.133 U1.134 U1.135 U1.136 U1.137 U1.139 U1.140 U1.141 U1.142 U2.5 U2.9 U4.5 U4.8 U4.9 U5.11 U5.12 U5.13 U5.14 U6.3 U8.1 U11.3 U11.4 U11.20 U11.21 U12.1 U13.9 U13.10 U13.11 U13.12 U13.15 U16.15 X2.2 X2.4

## Polygon pours and split planes (outlines as drawn)
NetD33_1 on Top Layer "NETD33_1_L01_P101" (solid, pour order 101): 95.059,16.447 94.869,16.256 94.869,9.588 95.123,9.335 102.679,9.335 103.124,8.89 103.124,2.857 103.441,2.54 106.045,2.54 106.299,2.794 106.299,12.573 105.346,13.525 102.298,13.525 102.108,13.716 102.108,16.002 101.663,16.447 95.059,16.447
NetD32_1 on Top Layer "NETD32_1_L01_P100" (solid, pour order 100): 80.581,16.447 80.328,16.192 80.328,9.525 80.518,9.335 87.82,9.335 88.265,8.89 88.265,2.857 88.582,2.54 91.186,2.54 91.44,2.794 91.44,12.573 90.487,13.525 87.503,13.525 87.439,13.525 87.376,13.589 87.376,16.066 86.995,16.447 80.581,16.447
VCC_24V on Top Layer "VCC_24V_L01_P098" (solid, pour order 98): 82.867,17.843 82.867,22.225 82.995,22.352 94.996,22.352 95.123,22.225 95.123,17.78 97.79,17.78 97.79,22.034 98.044,22.288 110.299,22.288 110.49,22.098 110.744,22.098 110.998,22.352 111.061,22.415 111.061,25.654 111.061,27.622 110.871,27.813 110.49,27.813 110.426,27.749 110.109,27.432 110.045,27.432 99.377,27.432 99.219,27.273 99.06,27.114 99.06,25.463 99.06,25.4 98.361,24.701 98.108,24.701 80.899,24.701 80.645,24.447 80.645,17.843 82.867,17.843
VCC_24V on Top Layer "VCC_24V_L01_P092" (solid, pour order 92): 103.759,27.432 103.505,27.178 103.505,25.654 103.759,25.4 110.172,25.4 110.871,24.701 110.998,24.701 111.125,24.828 111.125,28.067 110.744,28.067 110.426,27.749 110.109,27.432 103.759,27.432
VCC_24V on Top Layer "VCC_24V_L01_P096" (solid, pour order 96): 115.252,19.748 110.6,19.748 110.49,19.748 110.49,24.447 115.633,24.447 115.633,20.13 115.252,19.748
VCC_24V on Top Layer "VCC_24V_L01_P093" (solid, pour order 93): 110.172,37.401 110.744,37.973 110.744,33.718 110.236,34.227 102.171,34.227 101.854,34.544 101.854,35.052 101.854,42.1 102.425,42.672 102.425,47.816 102.552,47.942 103.378,47.942 103.505,47.816 103.505,42.672 104.457,41.719 104.457,41.338 104.457,37.719 104.775,37.401
VCC_24V on Top Layer "VCC_24V_L01_P094" (solid, pour order 94): 110.807,23.812 110.49,24.13 110.49,49.212 110.807,49.53 127.825,49.53 127.953,49.403 127.953,48.514 127.825,48.387 123.571,48.387 122.174,46.99 116.205,46.99 115.633,46.419 115.633,24.13 115.316,23.812 110.807,23.812
VCC_24V on Top Layer "VCC_24V_L01_P089" (solid, pour order 89): 70.294,14.16 70.294,9.779 70.549,9.525 71.501,9.525 71.819,9.842 71.819,14.478 72.009,14.668 72.009,14.986 71.755,15.24 70.485,15.24 70.104,14.859 70.104,14.668 70.294,14.478 70.294,14.16 70.294,11.43
VCC_VALVE on Top Layer "VCC_VALVE_L01_P088" (solid, pour order 88): 60.261,14.478 60.261,11.367 60.261,9.716 60.515,9.461 61.468,9.461 61.722,9.716 61.785,9.779 61.785,14.478 61.976,14.668 61.976,14.986 61.722,15.24 61.151,15.24 60.325,15.24 60.071,14.986 60.071,14.859 60.071,14.668 60.261,14.478
VCC_VALVE on Top Layer "VCC_VALVE_L01_P097" (solid, pour order 97): 50.292,11.43 50.292,14.16 50.292,14.478 50.102,14.668 50.102,14.986 50.355,15.24 51.752,15.24 52.006,14.986 52.006,14.668 51.816,14.478 51.816,9.842 51.498,9.525 50.546,9.525 50.292,9.779 50.292,11.43
VCC_VALVE on Top Layer "VCC_VALVE_L01_P084" (solid, pour order 84): 40.195,9.779 40.195,14.478 40.005,14.668 40.005,14.986 40.259,15.24 41.656,15.24 41.91,14.986 41.91,14.668 41.719,14.478 41.719,9.906 41.719,9.842 41.402,9.525 40.45,9.525 40.195,9.779
VCC_VALVE on Top Layer "VCC_VALVE_L01_P082" (solid, pour order 82): 30.162,9.779 30.162,14.478 29.972,14.668 29.972,14.986 30.226,15.24 31.623,15.24 31.686,15.176 31.877,14.986 31.877,14.668 31.686,14.478 31.686,9.842 31.432,9.588 31.369,9.525 30.416,9.525 30.162,9.779
VCC_24V_IN on Top Layer "VCC_24V_IN_L01_P078" (solid, pour order 78): 109.855,16.51 109.22,15.875 109.22,0.635 109.537,0.318 133.032,0.318 133.35,0.635 133.35,4.763 137.477,8.89 137.477,14.605 137.16,14.922 128.27,14.922 127.953,14.605 127.953,5.715 127.635,5.397 117.221,5.397 115.57,5.397 115.252,5.715 115.252,12.636 115.252,16.192 114.935,16.51
NetJ3_1 on Top Layer "NETJ3_1_L01_P079" (solid, pour order 79): 130.493,15.557 130.493,23.812 130.81,24.13 131.381,24.13 137.16,24.13 137.477,23.812 137.477,15.557 137.287,15.367 137.16,15.24 134.493,15.24 130.81,15.24 130.493,15.557
NetD1_2 on Top Layer "NETD1_2_L01_P080" (solid, pour order 80): 130.493,24.765 130.493,32.703 130.81,33.02 137.096,33.02 137.16,33.02 137.414,32.766 137.477,32.703 137.477,32.512 137.477,24.765 137.16,24.447 130.81,24.447 130.493,24.765
VCC_24V on Top Layer "VCC_24V_L01_P081" (solid, pour order 81): 110.49,24.384 110.49,23.812 110.172,23.495 110.172,20.176 110.6,19.748 115.252,19.748 115.633,20.13 115.633,24.32 115.316,24.638 114.871,24.638 110.617,24.638 110.49,24.511 110.49,24.384
VCC_24V on Top Layer "VCC_24V_L01_P083" (solid, pour order 83): 117.475,41.593 117.602,41.465 117.602,40.576 117.475,40.45 115.824,40.45 115.633,40.259 115.379,40.513 115.379,41.212 115.379,41.656 115.506,41.783 115.633,41.783 115.824,41.593 117.475,41.593
VCC_5V on Top Layer "VCC_5V_L01_P085" (solid, pour order 85): 121.602,70.168 121.285,69.85 121.285,66.358 120.968,66.04 114.364,66.04 114.173,65.849 114.173,62.865 113.855,62.547 112.395,62.547 112.078,62.865 112.078,63.754 112.078,68.135 113.347,69.406 113.347,73.977 113.03,74.295 112.84,74.295 111.442,74.295 111.125,73.977 111.125,70.802 109.982,69.659 109.537,69.659 108.479,69.659 108.286,69.467 108.267,69.448 108.267,61.023 110.172,59.118 110.236,59.055 117.221,59.055 117.475,59.309 117.475,62.547 117.729,62.801 117.792,62.865 118.427,62.865 125.412,62.865 125.73,63.182 125.73,69.85 125.412,70.168 121.602,70.168
NetC60_1 on Top Layer "NETC60_1_L01_P086" (solid, pour order 86): 131.127,50.038 131.318,49.847 133.667,49.847 133.985,50.165 133.985,52.07 135.89,53.975 135.89,54.8 135.89,69.85 135.572,70.168 131.445,70.168 131.127,69.85 131.127,69.659 131.127,50.038
NetC70_1 on Top Layer "NETC70_1_L01_P087" (solid, pour order 87): 100.52,51.181 101.981,51.181 102.108,51.308 102.108,51.371 102.108,53.721 101.854,53.975 98.996,56.832 96.837,56.832 81.597,56.832 81.343,56.578 81.28,56.515 81.28,55.88 81.28,51.435 81.407,51.308 81.534,51.181 81.788,51.181 101.663,51.181
VCC_12V on Top Layer "VCC_12V_L01_P099" (solid, pour order 99): 81.787,42.418 82.995,42.418 88.582,36.83 88.582,36.512 88.582,34.29 88.265,33.972 79.248,33.972 79.121,33.846 78.74,33.465 78.74,32.131 78.74,31.178 79.121,30.797 81.343,30.797 92.202,30.797 92.964,31.559 93.027,31.623 93.027,31.941 93.027,38.481 92.456,39.052 88.9,42.608 88.9,43.942 88.9,46.736 88.646,46.99 81.915,46.99 81.597,46.736 81.597,45.72 81.597,42.609
NetD1_2 on Top Layer "NETD1_2_L01_P102" (solid, pour order 102): 121.92,24.765 121.92,32.703 122.237,33.02 137.096,33.02 137.477,32.639 137.477,24.765 137.16,24.447 122.237,24.447 121.92,24.765
GND_IN on Top Layer "GND_IN_L01_P103" (solid, pour order 103): 115.887,21.907 115.887,38.417 140,38.417 140,21.907 115.887,21.907
NetQ1_5 on Top Layer "NETQ1_5_L01_P104" (solid, pour order 104): 115.887,13.399 115.887,21.59 140,21.59 140,13.399 115.887,13.399
PGND on Top Layer "PGND_L01_P109" (solid, remove dead copper, pour order 109): 0,39.827 0,0.012 139.936,0.012 140,0.076 140,13.339 139.928,13.411 115.887,13.411 115.887,38.747 115.905,38.765 113.012,38.765 113.012,52.405 106.29,59.127 80.581,59.118 78.677,57.214 78.676,48.78 77.153,48.78 75.882,47.51 75.882,46.05 75.882,44.462 74.168,44.462 74.168,36.512 75.438,35.242 75.438,20.586 74.803,19.951 64.579,19.951 63.881,19.253 25.654,19.253 24.638,20.269 24.638,24.46 21.59,24.46 21.59,26.682 18.479,26.682 16.573,28.587 16.573,32.956 13.589,32.956 13.589,39.827
DGND on Top Layer "DGND_L01_P111" (solid, remove dead copper, pour order 111): 0,39.814 0,80.01 0.01,80 140,80 140,38.753 115.633,38.753 113.012,38.753 113.012,52.405 106.299,59.118 80.581,59.118 78.677,57.214 78.676,48.768 77.153,48.768 75.882,47.498 75.882,44.45 74.168,44.45 74.168,36.512 75.438,35.242 75.438,20.574 74.803,19.939 64.579,19.939 63.881,19.241 25.654,19.241 24.638,20.256 24.638,24.447 21.59,24.447 21.59,26.67 18.479,26.67 16.573,28.575 16.573,32.703 13.589,32.703 13.589,39.814
GND_IN on Bottom Layer "GND_IN_L02_P105" (solid, pour order 105): 115.887,38.417 115.887,21.907 140,21.907 140,38.417 115.887,38.417
NetQ1_5 on Bottom Layer "NETQ1_5_L02_P107" (solid, pour order 107): 115.887,21.59 115.887,13.399 139.928,13.399 140,13.399 140,21.59 115.887,21.59
PGND on Bottom Layer "PGND_L02_P110" (solid, remove dead copper, pour order 110): 0,39.814 0,0 139.936,0 140,0.064 140,13.327 139.928,13.399 115.887,13.399 115.887,38.735 115.905,38.753 113.012,38.753 113.012,52.405 106.299,59.119 80.581,59.118 78.677,57.214 78.676,48.768 77.153,48.768 75.882,47.498 75.882,46.038 75.882,44.45 74.168,44.45 74.168,37.148 75.438,35.877 75.438,20.574 74.803,19.939 64.579,19.939 63.881,19.241 25.654,19.241 24.638,20.256 24.638,24.447 21.59,24.447 21.59,26.67 18.479,26.67 16.573,28.575 16.573,32.703 13.589,32.703 13.589,39.814
DGND on Bottom Layer "DGND_L02_P112" (solid, remove dead copper, pour order 112): 0,39.814 0,80.01 0.01,80 140,80 140,38.753 115.633,38.753 113.012,38.753 113.012,52.405 106.299,59.118 80.581,59.118 78.677,57.214 78.676,48.768 77.153,48.768 75.882,47.498 75.882,44.45 74.168,44.45 74.168,36.512 75.438,35.242 75.438,20.574 74.803,19.939 64.579,19.939 63.881,19.241 25.654,19.241 24.638,20.256 24.638,24.447 21.59,24.447 21.59,26.67 18.479,26.67 16.573,28.575 16.573,32.707 13.589,32.707 13.589,39.814

## Keep-outs
Keep-Out Layer:
  the board outline again, w0.15

## Other copper
Top Layer:
  region net VCC_12V_DEVICE: 68.897,19.304 68.834,19.241 68.834,16.954 69.85,16.954 69.85,19.367 68.897,19.367 68.834,19.304

## Silkscreen, mask and mechanical layers (free items; w line width, h text height)
Top Overlay:
  lines w0.05: 22.924,86.741 23.495,86.741 ; 23.876,86.36 23.876,87.122 ; 24.575,86.741 23.876,86.741 ; 28.13,87.249 28.702,87.249 ; 29.083,86.868 29.083,87.63 ; 29.781,87.249 29.083,87.249 ; 37.529,90.17 38.1,90.17 ; 38.481,89.789 38.481,90.551 ; 39.179,90.17 38.481,90.17 ; 49.149,88.519 49.721,88.519 ; 50.102,88.138 50.102,88.9 ; 50.8,88.519 50.102,88.519 ; 23.876,86.741 23.495,86.36 23.495,87.122 23.876,86.741 ; 29.083,87.249 28.702,87.63 28.702,86.868 29.083,87.249 ; 38.481,90.17 38.1,89.789 38.1,90.551 38.481,90.17 ; 50.102,88.519 49.721,88.9 49.721,88.138 50.102,88.519
  lines w0.1: 43.878,77.343 56.007,77.343 ; 44.514,67.818 55.944,67.818
  text "12V/5V" at 0.572,78.613 h1.2
  text "GND" at 30.988,78.18 h1
  text "D-" at 26.543,78.168 h1
  text "D+" at 28.639,78.168 h1
  text "GND" at 74.041,78.155 h1.2
  text "ADC" at 76.708,78.155 h1.2
  text "KEY" at 79.566,78.168 h1.2
  text "VBUS" at 23.114,78.105 h1
  text "GND" at 0.508,77.597 h1.2
  text "5V" at 86.106,77.279 h1.2
  text "PWM" at 82.55,77.216 h1.2
  text "3V3" at 88.963,76.962 h1.5
  text "SWD" at 91.567,76.962 h1.5
  text "SCLK" at 94.869,76.962 h1.5
  text "GND" at 98.679,76.962 h1.5
  text "TX" at 0.508,76.517 h1.2
  text "RX" at 0.635,75.374 h1.2
  text "TX" at 0.572,74.231 h1.2
  text "5V" at 17.526,73.571 h1
  text "3V3" at 88.456,73.533 h1.2 r270
  text "RX" at 9.271,73.406 h1
  text "TX" at 11.239,73.406 h1
  text "IO" at 13.208,73.406 h1
  text "RX" at 0.635,72.962 h1.2
  text "RX" at 81.682,70.929 h1.2 r270
  text "TX" at 81.597,68.072 h1.2 r270
  text "GND" at 85.598,65.532 h1.2
  text "5VLED" at 98.996,62.801 h1.5
  text "12VLED" at 77.851,46.228 h1.5 r90
  text "CN4" at 0.191,39.116 h1.2
  text "CN5" at 7.175,39.052 h1.2
  text "DAC" at 7.048,36.512 h1 r90
  text "DAC" at 14.097,36.449 h1 r90
  text "电源" at 128.938,34.861 h3 r270
  text "GND" at 7.048,33.909 h1 r90
  text "GND" at 14.097,33.337 h1 r90
  text "VCC" at 7.048,31.305 h1 r90
  text "VCC" at 14.097,31.051 h1 r90
  text "CN2" at 0.254,29.654 h1.2
  text "CN3" at 7.556,29.654 h1.2
  text "保险丝" at 129.984,27.178 h2 r270
  text "DAC" at 6.985,26.924 h1 r90
  text "DAC" at 14.16,26.86 h1 r90
  text "GND" at 83.947,25.856 h1
  text "GND" at 89.155,25.856 h1
  text "12V" at 86.551,25.845 h1
  text "24V" at 91.757,25.845 h1
  text "GND" at 6.985,24.32 h1 r90
  text "GND" at 14.16,24.257 h1 r90
  text "VCC" at 6.985,21.717 h1 r90
  text "VCC" at 14.16,21.653 h1 r90
  text "CN1" at 0.318,20.383 h1.2
  text "开关键" at 128.969,19.177 h3 r270
  text "DAC" at 7.112,18.288 h1 r90
  text "GND" at 7.112,15.684 h1 r90
  text "VCC" at 7.112,13.081 h1 r90
  text "PWM" at 84.772,9.271 h1.5 r180
  text "M-" at 86.868,9.271 h1.5 r180
  text "M+" at 89.599,9.271 h1.5 r180
  text "PWM" at 99.314,9.271 h1.5 r180
  text "M-" at 101.409,9.271 h1.5 r180
  text "M+" at 104.14,9.271 h1.5 r180
  text "CN4" at 46.038,0.953 h1.2 r90
  text "CN2" at 56.134,0.889 h1.2 r90
  text "CN1" at 66.103,0.889 h1.2 r90
  text "REV1" at 23.114,0.508 h1.2 r90
  text "CN5" at 25.654,0.508 h1.2 r90
  text "CN3" at 35.814,0.508 h1.2 r90
  text "REV2" at 8.128,0.381 h1.2 r90
Bottom Overlay:
  lines w0.06: 37.465,77.978 64.072,77.978 ; 40.767,76.708 40.767,79.375 ; 43.624,76.708 43.624,79.375 ; 46.101,76.708 46.101,79.375 ; 48.895,76.708 48.895,79.375 ; 51.371,76.708 51.371,79.375 ; 53.53,76.708 53.53,79.375 ; 56.134,76.708 56.134,79.375 ; 58.229,76.708 58.229,79.375 ; 61.214,76.708 61.214,79.375 ; 37.465,76.708 64.072,76.708 64.072,79.375 37.465,79.375 37.465,76.708
  text "main" at 45.72,78.486 h1
  text "slience" at 40.513,78.422 h1
  text "gnd" at 48.197,78.422 h1
  text "en_a" at 51.054,78.422 h1
  text "acled" at 55.88,78.422 h1
  text "pwrkey" at 61.087,78.422 h1
  text "pwrled" at 63.881,78.422 h1
  text "nibp" at 42.735,78.359 h1
  text "gnd" at 57.848,78.359 h1
  text "rcd" at 53.149,78.295 h1
  text "pause" at 40.259,77.216 h1
  text "en_b" at 51.054,77.216 h1
  text "nc" at 57.658,77.216 h1
  text "nc" at 63.309,77.216 h1
  text "print" at 45.783,77.153 h1
  text "en_pb" at 48.641,77.153 h1
  text "gnd" at 53.149,77.153 h1
  text "nc" at 60.134,77.153 h1
  text "yled" at 55.626,77.089 h1
  text "freeze" at 43.434,77.025 h1
Mechanical 15:
  drawing of 359 lines, arcs and shapes, not listed

## Text inside footprints (layer, text, board x,y; h text height)
C1: Top Overlay "-" at 116.512,10.732 h1; Top Overlay "+" at 112.462,10.682 h1
C61: Top Overlay "-" at 119.202,57.201 h1 r270; Top Overlay "+" at 119.152,61.251 h1 r270
C72: Top Overlay "-" at 95.199,40.907 h1; Top Overlay "+" at 91.149,40.857 h1
J7: Top Overlay "23" at 26.86,25.082 h1.27; Top Overlay "13" at 30.162,53.785 h1.27; Top Overlay "12" at 71.183,54.737 h1.27; Top Overlay "1" at 71.755,25.4 h1.27
U1: Top Overlay "ARM" at 41.689,40.802 h2.54; Top Overlay "STM32F103" at 41.816,49.438 h1.78
U8: Bottom Overlay "1" at 10.731,45.467 h1.52 r180; Bottom Overlay "3" at 2.356,45.467 h1.52 r180; Bottom Overlay "4" at 2.256,54.092 h1.52 r180; Bottom Overlay "6" at 10.706,54.291 h1.52 r180
U12: Top Overlay "6" at 2.756,51.878 h1.52 r180; Top Overlay "4" at 11.206,51.679 h1.52 r180; Top Overlay "3" at 11.106,43.054 h1.52 r180; Top Overlay "1" at 2.731,43.054 h1.52 r180